# EAGLE board PCB (EAGLE 9.7.0)
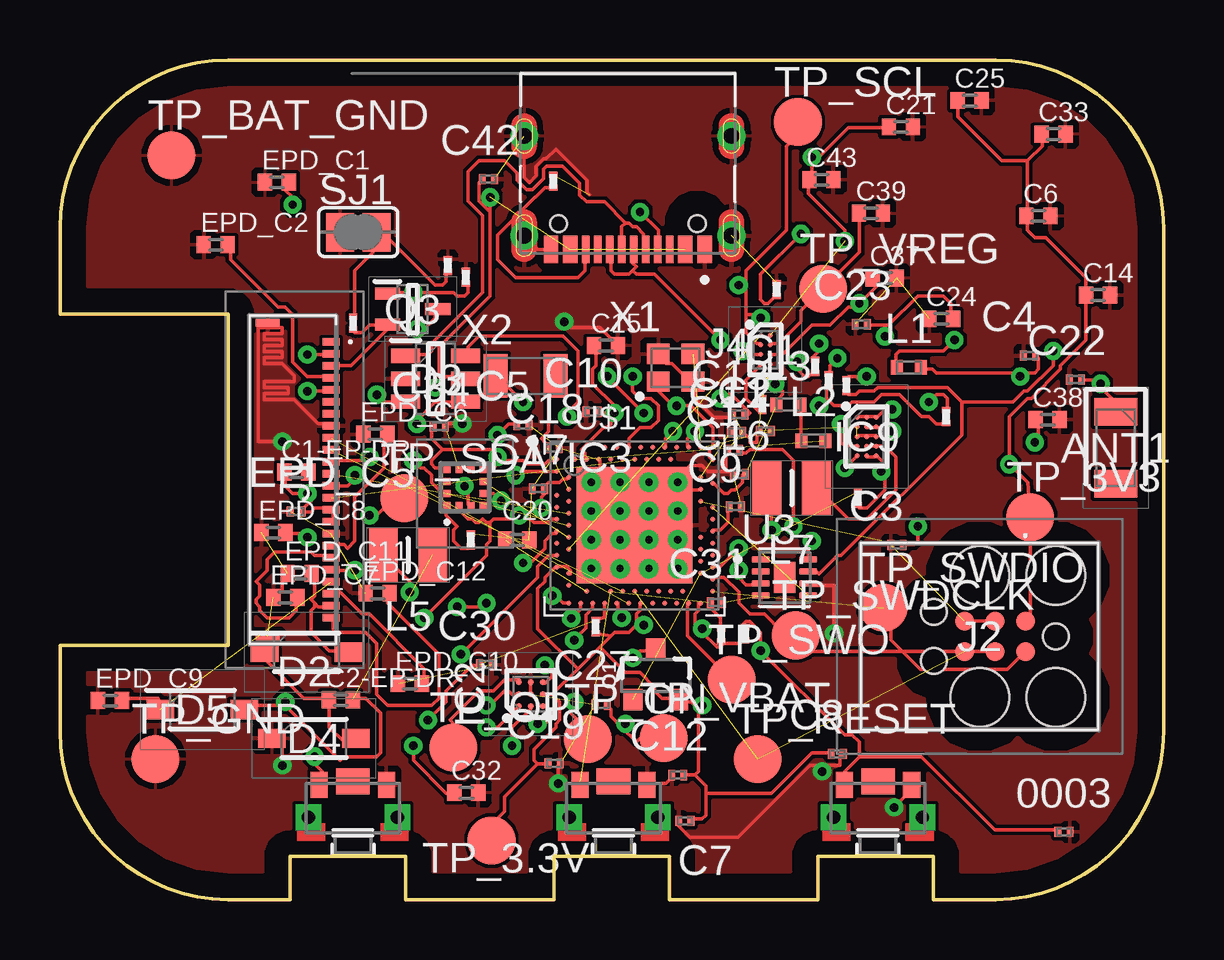
[diagram p0: board, top side]
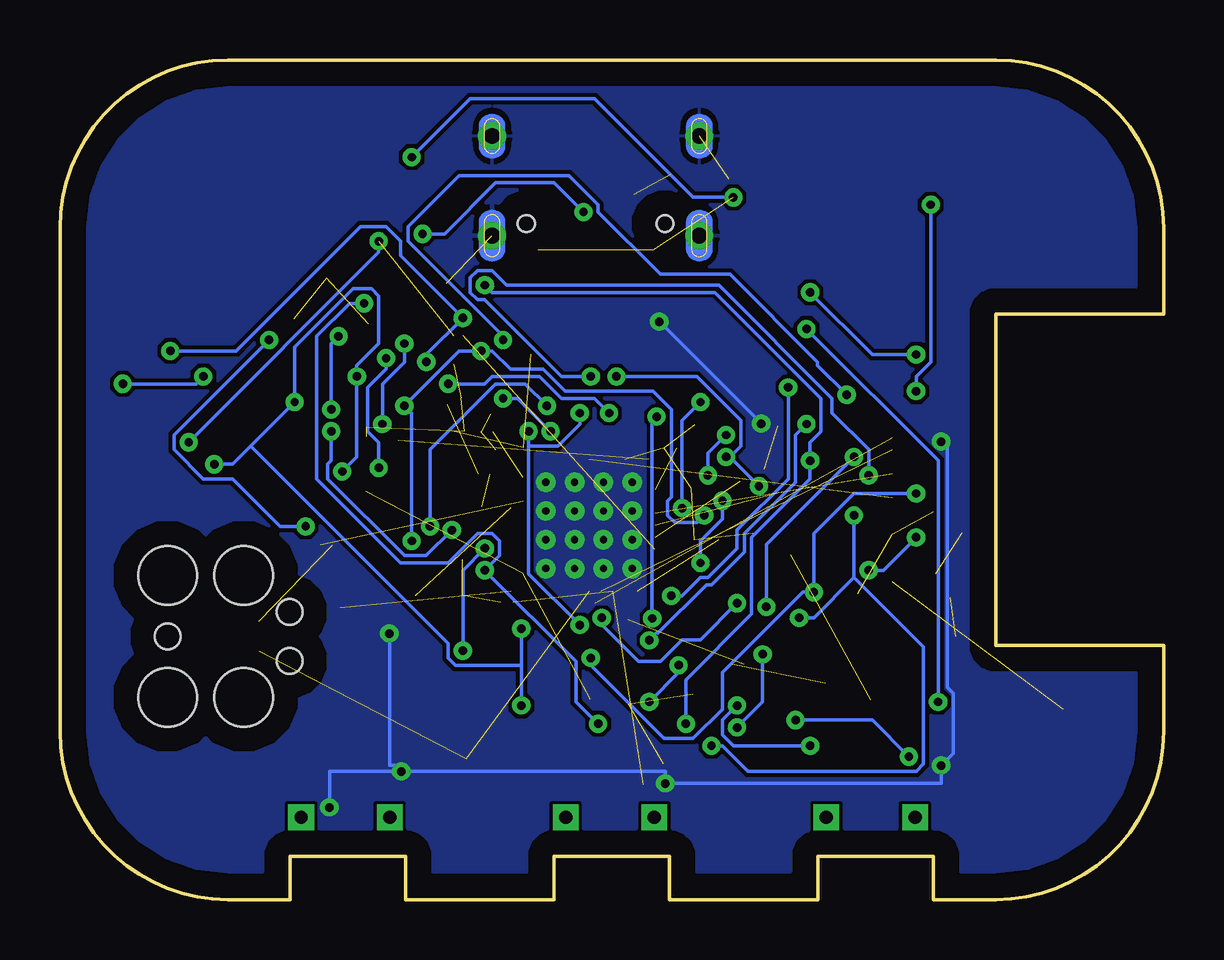
[diagram p1: board, bottom side, seen from below]

Size 46 x 35 mm. Coordinates in mm from the lower left corner, seen from the top.
Outline: 39,0 36.4,0 36.4,1.8 31.6,1.8 31.6,0 25.4,0 25.4,1.8 20.6,1.8 20.6,0 14.4,0 14.4,1.8 9.6,1.8 9.6,0 7,0 arc-90 0,7 0,10.6 7,10.6 7,24.4 0,24.4 0,28 arc-90 7,35 39,35 arc-90 46,28 46,7 arc-90 39,0
Copper layers (1*16): Top / Bottom
Stack-up Default Layer Stack: Top SilkScreen Epoxy Ink / Top SolderMask SR:Green 0.0254mm Dk 4.3 / Top Surface Finish Lead-Free 0.02mm / Top CuFoil:007 0.035mm / Dielectric-1 User Defined 1.5mm / Bottom CuFoil:007 0.035mm / Bottom Surface Finish Lead-Free 0.02mm / Bottom SolderMask SR:Green 0.0254mm Dk 4.3 / Bottom SilkScreen Epoxy Ink
Design rules: minimum copper width 6mil, minimum drill size 0.35mm, copper clearance wire_polygon to wire_polygon 6mil, copper clearance wire_polygon to pad_smd 6mil, copper clearance wire_polygon to via 6mil, copper clearance pad_smd to pad_smd 6mil, copper clearance pad_smd to via 6mil, copper clearance via to via 6mil, copper clearance smd to pad (same net) 6mil, copper clearance smd to via (same net) 6mil, copper clearance smd to smd (same net) 6mil, dimension clearance 40mil, via restrict clearance 0mil, restrict clearance 0mil, drill distance 6mil, keepout clearance 0mil

## Footprints (pad centres in the part's own frame; a part is rotated, then mirrored left to right if it is on the bottom)
NORDIC_NRF_3_RESC0201_L = smd 0.28 x 0.43: 1 -0.255,0; 2 0.255,0
2450AT18B100E_ANTC3216X140N = smd 1.15 x 1.8: 1 -1.5,0; 2 1.5,0
PERFECT_0402_0402 = smd 0.6 x 0.7: 1 -0.5,0; 2 0.5,0
ESP32_C6_LIBRARY_5_SOD3716X135N = smd 1.15 x 0.8: 1 -1.75,0; 2 1.75,0
ESP32_C6_LIBRARY_3_SOT95P280X145-6N = smd 1.2 x 0.6: 1 -1.25,0.95; 2 -1.25,0; 3 -1.25,-0.95; 4 1.25,-0.95; 5 1.25,0; 6 1.25,0.95
BQ25180YBGR_BGA8C40P2X4_100X155X50 = smd 0.2 x 0.2: A1 -0.2,0.6; A2 0.2,0.6; B1 -0.2,0.2; B2 0.2,0.2; C1 -0.2,-0.2; C2 0.2,-0.2; D1 -0.2,-0.6; D2 0.2,-0.6
DRV2605YZFR_BGA9C50P3X3_144X144X62 = smd 0.25 x 0.25: A1 -0.5,0.5; A2 0,0.5; A3 0.5,0.5; B1 -0.5,0; B2 0,0; B3 0.5,0; C1 -0.5,-0.5; C2 0,-0.5; C3 0.5,-0.5
BMA423_BMA423 = smd 0.3 x 0.35: 1 -0.75,-0.775; 2 -0.25,-0.775; 3 0.25,-0.775; 4 0.75,-0.775; 7 0.75,0.775; 8 0.25,0.775; 9 -0.25,0.775; 10 -0.75,0.775 | smd 0.35 x 0.3: 5 0.775,-0.25; 6 0.775,0.25; 11 -0.775,0.25; 12 -0.775,-0.25
RT6160AWSC_BGA15C40P3X5_140X230X60 = smd 0.216 x 0.216: A1 -0.4,0.8; A2 0,0.8; A3 0.4,0.8; B1 -0.4,0.4; B2 0,0.4; B3 0.4,0.4; C1 -0.4,0; C2 0,0; C3 0.4,0; D1 -0.4,-0.4; D2 0,-0.4; D3 0.4,-0.4; E1 -0.4,-0.8; E2 0,-0.8; E3 0.4,-0.8
503480-2400_5034802400 = smd 0.3 x 0.7: 1 -5.75,1.525; 2 -5.25,1.525; 3 -4.75,1.525; 4 -4.25,1.525; 5 -3.75,1.525; 6 -3.25,1.525; 7 -2.75,1.525; 8 -2.25,1.525; 9 -1.75,1.525; 10 -1.25,1.525; 11 -0.75,1.525; 12 -0.25,1.525; 13 0.25,1.525; 14 0.75,1.525; 15 1.25,1.525; 16 1.75,1.525; 17 2.25,1.525; 18 2.75,1.525; 19 3.25,1.525; 20 3.75,1.525; 21 4.25,1.525; 22 4.75,1.525; 23 5.25,1.525; 24 5.75,1.525 | smd 0.3 x 1: MP1 -6.54,-1.125; MP2 6.54,-1.125
TC2030-IDC_TC2030IDC = smd 0.783 x 0.783: 1 -0.953,-0.635; 2 -0.953,0.635; 3 0.317,-0.635; 4 0.317,0.635; 5 1.588,-0.635; 6 1.588,0.635 | hole 2.451: -2.223,-2.54; -2.223,2.54; 0.952,-2.54; 0.952,2.54 | hole 1.067: -2.223,0; 2.857,-1.016; 2.857,1.016
KH-TYPE-C-16P_KINGHELM_KH-TYPE-C-16P = smd 0.6 x 1.15: A1_B12 -3.2,4.725; A4_B9 -2.4,4.725; A9_B4 2.4,4.725; A12_B1 3.2,4.725 | smd 0.3 x 1.15: A5 -1.25,4.725; A6 -0.25,4.725; A7 0.25,4.725; A8 1.25,4.725; B5 1.75,4.725; B6 0.75,4.725; B7 -0.75,4.725; B8 -1.75,4.725 | drill 0.65 pad 1.05: SH1 -4.32,0; SH2 4.32,0; SH3 -4.32,4.15; SH4 4.32,4.15 | hole 0.7: -2.89,3.65; 2.89,3.65
NORDIC_NRF_2_RESC0402_L = smd 0.5 x 0.6: 1 -0.5,0; 2 0.5,0
MLP2016SR47MT0S1_INDC2016X100N = smd 1.2 x 2.2: 1 -1.028,0; 2 1.028,0
ESP32_C6_LIBRARY_4_ESP32_C6_LIBRARY_4_ESP32_C6_LIBRARY_4_ESP32_C6_LIBRARY_4_ESP32_WROVER_SPARKFUN-DISCRETESEMI_SOT23-3 = smd 0.8 x 0.9: 1 -0.95,-1; 2 0.95,-1; 3 0,1.1
ESP32_C6_LIBRARY_6_SOT65P210X110-3N = smd 1.05 x 0.5: 1 -1.05,0.65; 2 -1.05,-0.65; 3 1.05,0
CPF0201D7K68C1_0201 = smd 0.35 x 0.25: 1 0,0.275; 2 0,-0.275
ESP32_C6_LIBRARY_7_JUMPER_SJ = smd 1.168 x 1.6: 1 -0.762,0; 2 0.762,0
2025-10-22_07-23-44_LIBRARY_SW_EVP-AKE31A_PAN = smd 0.711 x 1.092: 1 -1.4,-0.972; 2 1.4,-0.972 | drill 0.559 pad 0.914 square: 3 -1.848,0.381; 4 1.848,0.381 | smd 1.397 x 1.092: 5 0,-1.124
HECTOR_WATCH_1_TP20R = smd 2 x 2: TP 0,0
ESP32_C6_LIBRARY_SON50P200X200X80-9N = smd 0.76 x 0.27: 1 -0.985,0.75; 2 -0.985,0.25; 3 -0.985,-0.25; 4 -0.985,-0.75; 5 0.985,-0.75; 6 0.985,-0.25; 7 0.985,0.25; 8 0.985,0.75 | smd 0.9 x 1.3: 9 0,0
NORDIC_NRF_4_AQFN50P700X700X85_HS-74N = smd 4.85 x 4.85: P$74 0,0 | drill 0.3 pad 0.6: P$75 -1.8,1.8; P$76 -0.6,1.8; P$77 0.6,1.8; P$78 1.8,1.8; P$79 -1.8,0.6; P$80 -0.6,0.6; P$81 0.6,0.6; P$82 1.8,0.6; P$83 -1.8,-0.6; P$84 -0.6,-0.6; P$85 0.6,-0.6; P$86 1.8,-0.6; P$87 -1.8,-1.8; P$88 -0.6,-1.8; P$89 0.6,-1.8; P$90 1.8,-1.8 | smd 0.2 x 0.2: P$A8 -1.25,3.25; P$A10 -0.75,3.25; P$A12 -0.25,3.25; P$A14 0.25,3.25; P$A16 0.75,3.25; P$A18 1.25,3.25; P$A20 1.75,3.25; P$A22 2.25,3.25; P$A23 2.75,3.25; P$AA24 3.25,-2.25; P$AB2 -2.75,-2.5; P$AC5 -2,-2.75; P$AC9 -1,-2.75; P$AC11 -0.5,-2.75; P$AC13 0,-2.75; P$AC15 0.5,-2.75; P$AC17 1,-2.75; P$AC19 1.5,-2.75; P$AC21 2,-2.75; P$AC24 3.25,-2.75; P$AD2 -2.75,-3.25; P$AD4 -2.25,-3.25; P$AD6 -1.75,-3.25; P$AD8 -1.25,-3.25; P$AD10 -0.75,-3.25; P$AD12 -0.25,-3.25; P$AD14 0.25,-3.25; P$AD16 0.75,-3.25; P$AD18 1.25,-3.25; P$AD20 1.75,-3.25; P$AD22 2.25,-3.25; P$AD23 2.75,-3.25; P$B1 -3.25,2.75; P$B3 -2.5,2.75; P$B5 -2,2.75; P$B7 -1.5,2.75; P$B9 -1,2.75; P$B11 -0.5,2.75; P$B13 0,2.75; P$B15 0.5,2.75; P$B17 1,2.75; P$B19 1.5,2.75; P$B24 3.25,2.75; P$C1 -3.25,2.25; P$D2 -2.75,2; P$D23 2.75,2; P$E24 3.25,1.75; P$F2 -2.75,1.5; P$F23 2.75,1.5; P$G1 -3.25,1.25; P$H2 -2.75,1; P$H23 2.75,1; P$J1 -3.25,0.75; P$J24 3.25,0.75; P$K2 -2.75,0.5; P$L1 -3.25,0.25; P$L24 3.25,0.25; P$M2 -2.75,0; P$N1 -3.25,-0.25; P$N24 3.25,-0.25; P$P2 -2.75,-0.5; P$P23 2.75,-0.5; P$R1 -3.25,-0.75; P$R24 3.25,-0.75; P$T2 -2.75,-1; P$T23 2.75,-1; P$U1 -3.25,-1.25; P$U24 3.25,-1.25; P$V23 2.75,-1.5; P$W1 -3.25,-1.75; P$W24 3.25,-1.75; P$Y2 -2.75,-2; P$Y23 2.75,-2
NORDIC_NRF_BT-XTAL_2016_N = smd 0.95 x 0.85: 1 -0.725,-0.575; 2 0.725,-0.575; 3 0.725,0.575; 4 -0.725,0.575
NORDIC_NRF_1_XTAL_3215_N = smd 1 x 1.8: 1 -1.25,0; 2 1.25,0

## Placement (x,y rotation side)
0003  [NORDIC_NRF_3_RESC0201_L]  41.85,2.82 0 top
ANT1  2450AT18B100E_2450AT18B100E  [2450AT18B100E_ANTC3216X140N]  44.01,18.83 270 top
C1  12pF  [NORDIC_NRF_3_RESC0201_L]  28.08,18.73 0 top
C1-EP-DR  10uF  [PERFECT_0402_0402]  9.85,17.82 0 top
C2  12pF  [NORDIC_NRF_3_RESC0201_L]  29.4,19.53 0 top
C2-EP-DR  4.7uF/25V  [PERFECT_0402_0402]  11.7,8.32 0 top
C3  1pF  [NORDIC_NRF_3_RESC0201_L]  34.89,14.78 0 top
C4  1pF  [NORDIC_NRF_3_RESC0201_L]  40.41,22.68 0 top
C5  100nF  [NORDIC_NRF_3_RESC0201_L]  19.3,19.78 0 top
C6  4.7µF  [PERFECT_0402_0402]  40.78,28.5 0 top
C7  100nF  [NORDIC_NRF_3_RESC0201_L]  26.05,3.28 180 top
C8  100nF  [NORDIC_NRF_3_RESC0201_L]  32.4,6.07 0 top
C9  820pF  [NORDIC_NRF_3_RESC0201_L]  28.15,16.38 0 top
C10  N.C.  [NORDIC_NRF_3_RESC0201_L]  22.18,20.33 0 top
C11  100pF  [NORDIC_NRF_3_RESC0201_L]  28.2,19.48 0 top
C12  100nF  [NORDIC_NRF_3_RESC0201_L]  25.75,5.19 0 top
C13  N.C.  [NORDIC_NRF_3_RESC0201_L]  28.3,20.23 0 top
C14  4.7µF  [PERFECT_0402_0402]  43.27,25.2 0 top
C15  1.0µF  [PERFECT_0402_0402]  22.76,23.1 0 top
C16  47nF  [NORDIC_NRF_3_RESC0201_L]  28.32,17.73 0 top
C17  12pF  [NORDIC_NRF_3_RESC0201_L]  19.94,17.13 0 top
C18  12pF  [NORDIC_NRF_3_RESC0201_L]  20.56,18.83 0 top
C19  100nF  [NORDIC_NRF_3_RESC0201_L]  20.6,5.68 0 top
C20  4.7µF  [PERFECT_0402_0402]  19.06,14.99 0 top
C21  4.7µF  [PERFECT_0402_0402]  35.05,32.21 0 top
C22  N.C.  [NORDIC_NRF_3_RESC0201_L]  42.33,21.68 0 top
C23  0.1uF  [NORDIC_NRF_3_RESC0201_L]  33.4,23.98 0 top
C24  10uF  [PERFECT_0402_0402]  36.73,24.21 0 top
C25  22uF  [PERFECT_0402_0402]  37.92,33.31 0 top
C27  0.1uF  [NORDIC_NRF_3_RESC0201_L]  22.56,8.13 0 top
C30  1uF  [NORDIC_NRF_3_RESC0201_L]  17.74,9.8 0 top
C31  1uF  [NORDIC_NRF_3_RESC0201_L]  27.37,12.38 0 top
C32  1uF  [PERFECT_0402_0402]  16.94,4.46 0 top
C33  22uF  [PERFECT_0402_0402]  41.41,31.91 0 top
C34  0.1uF  [NORDIC_NRF_3_RESC0201_L]  15.81,19.73 0 top
C37  1uF  [PERFECT_0402_0402]  34.38,25.91 0 top
C38  1uF  [PERFECT_0402_0402]  41.17,20.01 0 top
C39  10uF  [PERFECT_0402_0402]  33.8,28.61 0 top
C42  0.1uF  [NORDIC_NRF_3_RESC0201_L]  17.86,30.03 0 top
C43  4.7uF  [PERFECT_0402_0402]  31.74,30.01 0 top
D2  MBR0530  [ESP32_C6_LIBRARY_5_SOD3716X135N]  10.28,10.31 0 top
D3  USBLC6-2SC6Y  [ESP32_C6_LIBRARY_3_SOT95P280X145-6N]  15.66,21.71 0 top
D4  MBR0530  [ESP32_C6_LIBRARY_5_SOD3716X135N]  10.59,6.72 0 top
D5  MBR0530  [ESP32_C6_LIBRARY_5_SOD3716X135N]  5.93,7.92 0 top
EPD_C1  1uF/50V  [PERFECT_0402_0402]  9.04,29.9 0 top
EPD_C2  1uF/50V  [PERFECT_0402_0402]  6.49,27.3 0 top
EPD_C5  0.1uF/50V  [NORDIC_NRF_3_RESC0201_L]  9.85,16.18 0 top
EPD_C6  1uF/50V  [PERFECT_0402_0402]  13.14,19.4 0 top
EPD_C7  1uF/50V  [PERFECT_0402_0402]  9.39,12.6 0 top
EPD_C8  1uF/50V  [PERFECT_0402_0402]  8.89,15.3 0 top
EPD_C9  1uF/50V  [PERFECT_0402_0402]  2.09,8.3 0 top
EPD_C10  1uF/50V  [PERFECT_0402_0402]  14.59,9 0 top
EPD_C11  1uF/50V  [PERFECT_0402_0402]  9.99,13.6 0 top
EPD_C12  1uF/50V  [PERFECT_0402_0402]  13.24,12.77 0 top
IC1  BQ25180YBGR_BQ25180YBGR  [BQ25180YBGR_BGA8C40P2X4_100X155X50]  29.4,22.92 0 top
IC2  DRV2605YZFR  [DRV2605YZFR_BGA9C50P3X3_144X144X62]  19.62,8.56 90 top
IC3  BMA423_BMA423  [BMA423_BMA423]  16.88,17.18 0 top
IC9  RT6160AWSC_RT6160AWSC  [RT6160AWSC_BGA15C40P3X5_140X230X60]  33.62,19.3 0 top
J1  503480-2400_503480-2400  [503480-2400_5034802400]  9.78,17.5 270 top
J2  TC2030-IDC_TC2030-IDC  [TC2030-IDC_TC2030IDC]  39.29,10.97 180 top
J4  KH-TYPE-C-16P  [KH-TYPE-C-16P_KINGHELM_KH-TYPE-C-16P]  23.67,31.83 180 top
L1  3.9nH  [NORDIC_NRF_2_RESC0402_L]  35.38,22.18 0 top
L2  10µH  [NORDIC_NRF_2_RESC0402_L]  31.41,19.13 0 top
L3  15nH  [NORDIC_NRF_2_RESC0402_L]  30.36,20.63 0 top
L5  68uH  [MLP2016SR47MT0S1_INDC2016X100N]  14.51,14.37 0 top
L7  MLP2016SR47MT0S1_FTC252012SR47MBCA  [MLP2016SR47MT0S1_INDC2016X100N]  30.5,17.15 0 top
Q1  20V/4.2A/52mΩ/1.4W  [ESP32_C6_LIBRARY_4_ESP32_C6_LIBRARY_4_ESP32_C6_LIBRARY_4_ESP32_C6_LIBRARY_4_ESP32_WROVER_SPARKFUN-DISCRETESEMI_SOT23-3]  24.83,9.34 0 top
Q3  ESP32_C6_LIBRARY_6_SI1308EDL-T1-GE3  [ESP32_C6_LIBRARY_6_SOT65P210X110-3N]  14.7,24.61 0 top
R1_EP_DR  0.47  [CPF0201D7K68C1_0201]  12.22,24.03 0 top
R1_USB  5K1  [CPF0201D7K68C1_0201]  29.88,25.43 0 top
R2  0  [CPF0201D7K68C1_0201]  32.04,21.63 0 top
R2_EP_DR  10K  [CPF0201D7K68C1_0201]  16.92,25.94 0 top
R2_USB  5K1  [CPF0201D7K68C1_0201]  20.56,29.94 0 top
R3  0  [CPF0201D7K68C1_0201]  17.12,14.99 0 top
R4  0  [CPF0201D7K68C1_0201]  31.48,22.23 0 top
R5  10K  [CPF0201D7K68C1_0201]  22.33,11.38 0 top
R7  10K  [CPF0201D7K68C1_0201]  28.56,11.08 0 top
R8  10K  [CPF0201D7K68C1_0201]  27.56,11.03 0 top
R9  10K  [CPF0201D7K68C1_0201]  29.28,20.63 0 top
R17  3K3  [CPF0201D7K68C1_0201]  32.78,21.43 0 top
R18  3K3  [CPF0201D7K68C1_0201]  36.94,20.13 0 top
R_PWR_EPD  10K  [CPF0201D7K68C1_0201]  33.26,16.73 0 top
R_TYPE_SEL  2.2  [CPF0201D7K68C1_0201]  16.16,26.43 0 top
SJ1  [ESP32_C6_LIBRARY_7_JUMPER_SJ]  12.43,27.82 0 top
SW_DN  2025-10-22_07-23-44_LIBRARY_EVP-AKE31ASW_EVP-AKE31A_PAN  [2025-10-22_07-23-44_LIBRARY_SW_EVP-AKE31A_PAN]  34.1,3.81 180 top
SW_ENT  2025-10-22_07-23-44_LIBRARY_EVP-AKE31ASW_EVP-AKE31A_PAN  [2025-10-22_07-23-44_LIBRARY_SW_EVP-AKE31A_PAN]  23.07,3.81 180 top
SW_UP  2025-10-22_07-23-44_LIBRARY_EVP-AKE31ASW_EVP-AKE31A_PAN  [2025-10-22_07-23-44_LIBRARY_SW_EVP-AKE31A_PAN]  12.21,3.81 180 top
TP_3.3V  HECTOR_WATCH_1_TPTP20R  [HECTOR_WATCH_1_TP20R]  17.99,2.46 0 top
TP_3V3  HECTOR_WATCH_1_TPTP20R  [HECTOR_WATCH_1_TP20R]  40.44,15.94 0 top
TP_BAT_GND  HECTOR_WATCH_1_TPTP20R  [HECTOR_WATCH_1_TP20R]  4.65,31.02 0 top
TP_GND  HECTOR_WATCH_1_TPTP20R  [HECTOR_WATCH_1_TP20R]  3.98,5.86 0 top
TP_ON  HECTOR_WATCH_1_TPTP20R  [HECTOR_WATCH_1_TP20R]  22.01,6.69 0 top
TP_OP  HECTOR_WATCH_1_TPTP20R  [HECTOR_WATCH_1_TP20R]  16.4,6.34 0 top
TP_RESET  HECTOR_WATCH_1_TPTP20R  [HECTOR_WATCH_1_TP20R]  29.08,5.86 0 top
TP_SCL  HECTOR_WATCH_1_TPTP20R  [HECTOR_WATCH_1_TP20R]  30.76,32.41 0 top
TP_SDA  HECTOR_WATCH_1_TPTP20R  [HECTOR_WATCH_1_TP20R]  14.35,16.72 0 top
TP_SWDCLK  HECTOR_WATCH_1_TPTP20R  [HECTOR_WATCH_1_TP20R]  30.66,11.01 0 top
TP_SWDIO  HECTOR_WATCH_1_TPTP20R  [HECTOR_WATCH_1_TP20R]  34.33,12.16 0 top
TP_SWO  HECTOR_WATCH_1_TPTP20R  [HECTOR_WATCH_1_TP20R]  28.01,9.16 0 top
TP_VBAT  HECTOR_WATCH_1_TPTP20R  [HECTOR_WATCH_1_TP20R]  25.16,6.74 0 top
TP_VREG  HECTOR_WATCH_1_TPTP20R  [HECTOR_WATCH_1_TP20R]  31.82,25.46 0 top
U3  MAX17048G+T10  [ESP32_C6_LIBRARY_SON50P200X200X80-9N]  30.2,13.43 0 top
U$1  NORDIC_NRF_4_NRF52840_QF  [NORDIC_NRF_4_AQFN50P700X700X85_HS-74N]  23.95,15.6 0 top
X1  32MHz  [NORDIC_NRF_BT-XTAL_2016_N]  25.66,22.17 0 top
X2  32.768kHz  [NORDIC_NRF_1_XTAL_3215_N]  19.41,21.83 0 top

## Library data of the parts
0003 C1 C1-EP-DR C2 C2-EP-DR C3-C25 C27 C30-C34 C37-C39 C42 C43 EPD_C1 EPD_C2 EPD_C5-EPD_C12 L1-L3 R1_EP_DR R1_USB R2 R2_EP_DR R2_USB R3-R5 R7-R9 R17 R18 R_PWR_EPD R_TYPE_SEL SJ1 TP_3.3V TP_3V3 TP_BAT_GND TP_GND TP_ON TP_OP TP_RESET TP_SCL TP_SDA TP_SWDCLK TP_SWDIO TP_SWO TP_VBAT TP_VREG U$1 X1 X2 = InkTime_v5
ANT1 = InkTime_v5; ARROW_PART_NUMBER: 2450AT18B100E; ARROW_PRICE-STOCK: https://www.arrow.com/en/products/2450at18b100e/johanson-dielectrics?utm_currency=USD&region=nac; DESCRIPTION: Antennas 2.45GHz ANTENNA; HEIGHT: 1.4mm; MANUFACTURER_NAME: JOHANSON TECHNOLOGY; MANUFACTURER_PART_NUMBER: 2450AT18B100E; MOUSER_PART_NUMBER: 609-2450AT18B100E; MOUSER_PRICE-STOCK: https://www.mouser.co.uk/ProductDetail/Johanson-Technology/2450AT18B100E?qs=yCnrNFeXz%252Bh5MFsFIXGZGA%3D%3D
D2 D4 D5 = InkTime_v5; AVAILABILITY: In Stock; CHECK_PRICES: https://www.snapeda.com/parts/MBR0530/Onsemi/view-part/?ref=eda; DESCRIPTION: Diode Schottky 30 V 500mA Surface Mount SOD-123; MF: ON Semiconductor; MP: MBR0530; PACKAGE: SOD-123-2 ON Semiconductor; PRICE: None; PURCHASE-URL: https://www.snapeda.com/api/url_track_click_mouser/?unipart_id=179458&manufacturer=ON Semiconductor&part_name=MBR0530&search_term=None; SNAPEDA_LINK: https://www.snapeda.com/parts/MBR0530/Onsemi/view-part/?ref=snap
D3 = InkTime_v5; AVAILABILITY: In Stock; CHECK_PRICES: https://www.snapeda.com/parts/USBLC6-2SC6Y/STMicroelectronics/view-part/?ref=eda; DESCRIPTION: 17V Clamp 5A (8/20µs) Ipp Tvs Diode Surface Mount SOT-23-6; MF: STMicroelectronics; MP: USBLC6-2SC6Y; PACKAGE: SOT-23-6 STMicroelectronics; PRICE: None; SNAPEDA_LINK: https://www.snapeda.com/parts/USBLC6-2SC6Y/STMicroelectronics/view-part/?ref=snap
IC1 = InkTime_v5; ARROW_PART_NUMBER: BQ25180YBGR; ARROW_PRICE-STOCK: https://www.arrow.com/en/products/bq25180ybgr/texas-instruments?utm_currency=USD&region=nac; DESCRIPTION: Charger IC Lithium Ion/Polymer, Lithium Iron Phosphate 8-DSBGA (1.6x1.1); HEIGHT: 0.5mm; MANUFACTURER_NAME: Texas Instruments; MANUFACTURER_PART_NUMBER: BQ25180YBGR; MOUSER_PART_NUMBER: 595-BQ25180YBGR; MOUSER_PRICE-STOCK: https://www.mouser.co.uk/ProductDetail/Texas-Instruments/BQ25180YBGR?qs=doiCPypUmgEWjAK%252BJAX6Tw%3D%3D
IC2 = InkTime_v5; ARROW_PART_NUMBER: DRV2605YZFR; ARROW_PRICE-STOCK: https://www.arrow.com/en/products/drv2605yzfr/texas-instruments?region=nac; DESCRIPTION: Haptic Driver for ERM/LRA with Built-In Library and Smart Loop Architecture; HEIGHT: 0.625mm; MANUFACTURER_NAME: Texas Instruments; MANUFACTURER_PART_NUMBER: DRV2605YZFR
IC3 = InkTime_v5; ARROW_PART_NUMBER: BMA423; ARROW_PRICE-STOCK: https://www.arrow.com/en/products/bma423/bosch; DESCRIPTION: Accelerometers Triaxial low-g 12bit Acceleration Sensor; HEIGHT: 1mm; MANUFACTURER_NAME: BOSCH; MANUFACTURER_PART_NUMBER: BMA423; MOUSER_PART_NUMBER: 262-BMA423; MOUSER_PRICE-STOCK: https://www.mouser.co.uk/ProductDetail/Bosch-Sensortec/BMA423?qs=HXFqYaX1Q2xC%252BSgeGoX3mg%3D%3D
IC9 = InkTime_v5; DESCRIPTION: Buck-Boost Regulator Positive Output Step-Up/Step-Down I2C DC-DC Controller IC 15-WL-CSP (BSC) (1.4x2.3); HEIGHT: 0.6mm; MANUFACTURER_NAME: RICHTEK; MANUFACTURER_PART_NUMBER: RT6160AWSC; MOUSER_PART_NUMBER: 835-RT6160AWSC; MOUSER_PRICE-STOCK: https://www.mouser.co.uk/ProductDetail/Richtek/RT6160AWSC?qs=amGC7iS6iy%2FLd9PSoixZXQ%3D%3D
J1 = InkTime_v5; DESCRIPTION: FFC & FPC Connectors 0.5mm FPC RA SMT Dual Contact 24Ckt; HEIGHT: 1.87mm; MANUFACTURER_NAME: Molex; MANUFACTURER_PART_NUMBER: 503480-2400; MOUSER_PART_NUMBER: 538-503480-2400; MOUSER_PRICE-STOCK: https://www.mouser.co.uk/ProductDetail/Molex/503480-2400?qs=OAhjpuo3Vu7efIoxFh9AOw%3D%3D
J2 = InkTime_v5; DESCRIPTION: CABLE ADAPTER 6 POS; HEIGHT: 19mm; MANUFACTURER_NAME: Tag Connect; MANUFACTURER_PART_NUMBER: TC2030-IDC
J4 = InkTime_v5; AVAILABILITY: Not in stock; CHECK_PRICES: https://www.snapeda.com/parts/KH-TYPE-C-16P/Kinghelm/view-part/?ref=eda; MF: kinghelm; MP: KH-TYPE-C-16P; PACKAGE: None; PRICE: None; SNAPEDA_LINK: https://www.snapeda.com/parts/KH-TYPE-C-16P/Kinghelm/view-part/?ref=snap
L5 L7 = InkTime_v5; DESCRIPTION: SMD / SMT Inductors (Coils), L=0.47?H, L x W x T :; HEIGHT: 1mm; JLCPCB: https://jlcpcb.com/partdetail/6763488-FTC252012SR47MBCA/C5832368; MANUFACTURER_NAME: TDK; MANUFACTURER_PART_NUMBER: FTC252012SR47MBCA
Q1 = InkTime_v5; PROD_ID: TRAN-14388
Q3 = InkTime_v5; AVAILABILITY: In Stock; CHECK_PRICES: https://www.snapeda.com/parts/SI1308EDL-T1-GE3/Vishay+Siliconix/view-part/?ref=eda; DESCRIPTION: Si1308EDL-T1-GE3 N-channel MOSFET Transistor, 1.5 A, 30 V, 3-Pin SC-70 | Siliconix / Vishay SI1308EDL-T1-GE3; MF: Vishay Siliconix; MP: SI1308EDL-T1-GE3; PACKAGE: SOT-323 Vishay Semiconductor; PRICE: None; PURCHASE-URL: https://www.snapeda.com/api/url_track_click_mouser/?unipart_id=274603&manufacturer=Vishay Siliconix&part_name=SI1308EDL-T1-GE3&search_term=None; SNAPEDA_LINK: https://www.snapeda.com/parts/SI1308EDL-T1-GE3/Vishay+Siliconix/view-part/?ref=snap
SW_DN SW_ENT SW_UP = InkTime_v5; COPYRIGHT: Copyright (C) 2025 Ultra Librarian. All rights reserved.; DIGI-KEY_PART_NUMBER_1: P123437TR-ND; DIGI-KEY_PART_NUMBER_2: P123437CT-ND; DIGI-KEY_PART_NUMBER_3: P123437DKR-ND; MANUFACTURER_NAME: Panasonic; MANUFACTURER_PART_NUMBER: EVP-AKE31A
U3 = InkTime_v5; AVAILABILITY: In Stock; CHECK_PRICES: https://www.snapeda.com/parts/MAX17048G+T10/Analog+Devices/view-part/?ref=eda; DESCRIPTION: 3µA 1-Cell/2-Cell Fuel Gauge with ModelGauge; MF: Analog Devices; MP: MAX17048G+T10; PACKAGE: TDFN-8 Maxim; PRICE: None; PURCHASE-URL: https://www.snapeda.com/api/url_track_click_mouser/?unipart_id=329239&manufacturer=Analog Devices&part_name=MAX17048G+T10&search_term=None; SNAPEDA_LINK: https://www.snapeda.com/parts/MAX17048G+T10/Analog+Devices/view-part/?ref=snap

## Nets
3V3: C6.1 C7.1 C8.1 C12.2 C14.1 C19.1 C25.1 C33.1 C34.1 IC2.C2 IC3.3 IC3.7 IC3.10 IC9.E2 IC9.E3 J2.1 Q1.2 R5.2 R7.2 R8.2 R17.1 R18.1 R_PWR_EPD.2 TP_3.3V.TP TP_3V3.TP U$1.P$A22 U$1.P$AD14 U$1.P$AD23 U$1.P$B1 U$1.P$W1 U$1.P$Y2
ALERT: U3.5 U$1.P$J24
D+: D3.4 U$1.P$AD6
D-: D3.6 U$1.P$AD4
DEC1: C5.1 U$1.P$C1
DEC3: C11.1 U$1.P$D23
DEC4_6: C10.2 C15.1 C16.2 L3.1 U$1.P$B5 U$1.P$E24
DN: D3.1 J4.A7 J4.B7
DP: D3.3 J4.A6 J4.B6
EPD_3V3: C1-EP-DR.1 EPD_C5.2 J1.15 J1.16 L5.1 Q1.3
EPD_BUSY: J1.9 U$1.P$AD12
EPD_CS: J1.12 U$1.P$K2
EPD_DC: J1.11 U$1.P$AD10
EPD_RST: J1.10 U$1.P$AC11
GDR: J1.2 Q3.1 R2_EP_DR.2
GND: 0003.2 C1-EP-DR.2 C1.1 C2.1 C3.1 C4.1 C5.2 C6.2 C7.2 C8.2 C9.2 C10.1 C11.2 C12.1 C13.1 C14.2 C15.2 C16.1 C17.1 C18.2 C19.2 C20.2 C21.2 C22.1 C23.1 C24.1 C25.2 C27.1 C30.2 C31.2 C32.2 C33.2 C34.2 C37.2 C38.2 C39.2 C42.2 C43.2 D3.2 D4.1 EPD_C1.1 EPD_C2.1 EPD_C5.1 EPD_C6.1 EPD_C7.1 EPD_C8.1 EPD_C9.1 EPD_C10.1 EPD_C11.1 EPD_C12.1 IC1.D2 IC2.B2 IC2.B3 IC3.8 IC3.9 IC9.B1 IC9.C1 IC9.C2 IC9.C3 J1.8 J1.17 J1.MP1 J1.MP2 J2.3 J2.5 J4.A1_B12 J4.A12_B1 J4.SH1 J4.SH2 J4.SH3 J4.SH4 R1_USB.1 R2_EP_DR.1 R2_USB.1 R3.1 R9.1 R_TYPE_SEL.1 SJ1.1 SW_DN.1 SW_ENT.1 SW_UP.1 TP_BAT_GND.TP TP_GND.TP U3.1 U3.4 U3.6 U$1.P$74 U$1.P$75 U$1.P$76 U$1.P$77 U$1.P$78 U$1.P$79 U$1.P$80 U$1.P$81 U$1.P$82 U$1.P$83 U$1.P$84 U$1.P$85 U$1.P$86 U$1.P$87 U$1.P$88 U$1.P$89 U$1.P$90 U$1.P$B7 U$1.P$F23 X1.2 X1.4
HAPTIC_EN: IC2.A1 U$1.P$U1
IMU_INT1: IC3.5 U$1.P$N1
IMU_INT2: IC3.6 U$1.P$P2
LX1: IC9.B2 IC9.B3 L7.1
LX2: IC9.D2 IC9.D3 L7.2
MOSI: J1.14 U$1.P$B13
N$1: IC1.D1 R9.2
N$2: C2-EP-DR.1 D2.1 D4.2
N$3: IC3.1 R3.2
N$4: C23.2 C24.2 IC9.A1 IC9.A2 IC9.A3
N$5: IC9.E1 R2.1
N$6: R1_EP_DR.1 R_TYPE_SEL.2 SJ1.2
N$7: C20.1 U$1.P$AC5
N$8: C2-EP-DR.2 D5.2 L5.2 Q3.3
N$9: IC9.D1 R4.1
N$10: C9.1 U$1.P$N24
N$11: C32.1 IC2.A2
N$12: L2.2 U$1.P$B3
N$13: L2.1 L3.2
N$14: EPD_C6.2 J1.18
N$15: EPD_C7.2 J1.19
N$16: C13.2 U$1.P$A18
N$17: EPD_C2.2 J1.4
N$18: C2.2 U$1.P$A23 X1.3
N$19: C1.2 U$1.P$B24 X1.1
N$20: EPD_C8.2 J1.20
N$21: C3.2 L1.1 U$1.P$H23
N$22: J4.B5 R2_USB.2
N$23: EPD_C1.2 J1.5
N$24: EPD_C10.2 J1.22
N$25: U3.9
N$26: EPD_C12.2 J1.24
N$28: J4.A5 R1_USB.2
OUT+: IC2.A3 TP_OP.TP
OUT-: IC2.C3 TP_ON.TP
P0.00: C17.2 U$1.P$D2 X2.1
P0.01: C18.1 U$1.P$F2 X2.2
P0.04: U$1.P$J1
P0.09: U$1.P$L24
P0.13: C30.1 R5.1 SW_UP.2 U$1.P$AD8
P0.14: C31.1 R8.1 SW_ENT.2 U$1.P$AC9
P0.19: U$1.P$AC15
P0.20: U$1.P$AD16
P0.21: U$1.P$AC17
P0.22: U$1.P$AD18
P0.23: U$1.P$AC19
P0.24: U$1.P$AD20
P0.25: U$1.P$AC21
P0.26: U$1.P$G1
P0.27: U$1.P$H2
P0.28: U$1.P$B11
P0.29: U$1.P$A10
P0.30: U$1.P$B9
P0.31: U$1.P$A8
P1.01: Q1.1 R_PWR_EPD.1 U$1.P$Y23
P1.02: 0003.1 R7.1 SW_DN.2 U$1.P$W24
P1.03: U$1.P$V23
P1.04: U$1.P$U24
P1.05: U$1.P$T23
P1.06: U$1.P$R24
P1.07: U$1.P$P23
P1.09: U$1.P$R1
P1.10: U$1.P$A20
P1.11: U$1.P$B19
P1.12: U$1.P$B17
P1.13: U$1.P$A16
P1.14: U$1.P$B15
P1.15: U$1.P$A14
PMIC_INT: IC1.A1 U$1.P$T2
PREVGH: D5.1 EPD_C9.2 J1.21
PREVGL: D2.2 EPD_C11.2 J1.23
RESE: J1.3 Q3.2 R1_EP_DR.2
RESET: J2.6 TP_RESET.TP U$1.P$AC13
RF: ANT1.1 C4.2 C22.2 L1.2
SCK: J1.13 U$1.P$A12
SCL: IC1.B1 IC2.C1 IC3.12 R4.2 R17.2 TP_SCL.TP U3.7 U$1.P$M2
SDA: IC1.C1 IC2.B1 IC3.2 R2.2 R18.2 TP_SDA.TP U3.8 U$1.P$L1
SWDCLK: J2.4 TP_SWDCLK.TP U$1.P$AA24
SWDIO: J2.2 TP_SWDIO.TP U$1.P$AC24
SWO: TP_SWO.TP U$1.P$AD22
VBAT: C27.2 C37.1 IC1.C2 TP_VBAT.TP U3.2 U3.3
VBUS: C21.1 C38.1 C42.1 C43.1 D3.5 IC1.A2 J4.A4_B9 J4.A9_B4 U$1.P$AD2
VREG: C39.1 IC1.B2 TP_VREG.TP

## Tracks (layer width: path | path; a pad name or v marks a point on that pad's centre or on a via)
3V3  (via drill 0.35)
  Top 0.152: 40.33,30.8 40.33,28.51 | 40.33,30.8 40.94,31.41 40.94,31.86 C33.1 | 40.33,30.8 39.27,30.8 37.44,32.62 37.44,33.23 C25.1 | 40.33,28.51 40.49,28.36 40.33,28.21 40.33,27.9 40.64,27.6 41.09,27.6 42.77,25.92 42.77,25.31 C14.1 42.77,25.16 42.77,23.33 41.7,22.26 41.7,22.11 40.49,20.89 40.33,20.89 39.57,20.13 v39.57,18.15 40.34,17.38 TP_3V3.TP 40.44,11.8 J2.1 | 40.33,28.51 C6.1 | IC9.E2 33.63,18.45 33.93,18.45 IC9.E3 34.08,18.45 34.39,18.15 34.39,17.84 | 34.39,17.84 34.39,17.08 33.63,16.32 33.32,16.32 33.17,16.47 R_PWR_EPD.2 | v33.63,21.81 33.47,21.65 33.32,21.65 33.17,21.81 32.87,21.81 R17.1 | 34.39,17.84 v34.24,17.84 | v36.22,20.74 36.52,21.04 36.83,21.04 36.98,20.89 36.98,20.43 R18.1 | 26.77,11.14 27.38,10.53 27.53,10.53 27.68,10.68 | 26.77,11.14 26.46,11.44 26.46,11.9 26.62,12.05 26.62,12.36 U$1.P$AD23 | 27.68,10.68 28.29,10.68 28.45,10.83 R7.2 | 27.68,10.68 R8.2 | 26.92,4.43 26.92,4.74 26.46,5.19 | 26.92,4.43 26.92,3.52 26.77,3.36 26.31,3.36 C7.1 | 26.46,5.19 C12.2 | 26.92,4.43 29.66,4.43 31.34,6.11 32.1,6.11 C8.1 | 26.62,7.94 26.31,8.24 25.85,8.24 Q1.2 25.7,8.39 25.09,8.39 24.79,8.7 24.79,8.85 24.18,9.46 23.57,9.46 22.5,10.53 | 26.62,7.94 26.62,5.35 26.46,5.19 | 26.77,11.14 v26.77,11.29 | 26.62,7.94 v26.77,8.09 | 18.39,18.3 19.3,18.3 19.45,18.15 20.22,18.15 20.37,18.3 20.67,18.3 U$1.P$B1 | 18.39,18.3 18.08,18 17.78,18 IC3.7 | v16.86,17.23 17.02,17.08 17.02,16.47 IC3.3 | 18.39,18.3 v18.23,18.45 17.93,18.76 15.95,18.76 | 15.95,18.76 15.49,18.3 15.49,18.15 15.64,18 16.1,18 IC3.10 | 15.95,18.76 15.49,19.21 15.49,19.67 C34.1 | 19.91,5.65 20.22,5.65 C19.1 | 19.91,5.65 18.54,4.28 18.54,3.67 18.08,3.21 18.08,2.6 TP_3.3V.TP
  Top 0.152: 20.67,13.88 21.13,13.88 21.28,13.73 21.28,13.57 U$1.P$Y2 | 24.03,11.75 24.03,11.44 23.72,11.14 23.11,11.14 22.97,11 | 24.03,11.75 24.03,11.9 24.18,12.05 24.18,12.36 U$1.P$AD14 | 22.97,11 R5.2 | v26.46,19.52 26.16,19.21 26.16,18.91 U$1.P$A22 | 24.03,11.75 v24.33,11.44 | 20.52,8.55 20.22,8.55 IC2.C2 | 22.97,11 22.5,10.53 | 22.5,10.53 21.59,9.61 | 21.59,9.61 20.52,8.55 | 20.67,13.88 20.22,13.42 20.22,13.27 19.91,12.97 19.91,11.29 21.59,9.61 | 20.67,13.88 U$1.P$W1 | 19.91,5.65 19.76,5.8 19.76,6.26 20.67,7.17 20.67,7.33 20.82,7.48 20.82,8.24 20.52,8.55 | v22.81,21.81 v24.33,20.28
  Bottom 0.152: v34.24,17.84 33.63,18.45 v33.63,21.81 33.63,22.26 32.71,23.18 32.71,25.16 33.02,25.46 33.78,25.46 36.22,23.02 v36.22,20.74 38.05,18.91 | v39.57,18.15 38.81,18.15 38.05,18.91 | v26.77,8.09 26.77,9.77 | 26.77,9.77 v26.77,11.29 | 18.08,18.45 v16.86,17.23 | 26.46,18.91 26.46,13.57 v24.33,11.44 | 26.46,18.91 v26.46,19.52 | 18.08,18.45 17.62,18.91 17.62,19.98 19.45,21.81 v22.81,21.81 | v24.33,20.28 24.33,19.82 25.25,18.91 26.46,18.91 | 18.08,18.45 v18.23,18.45 | 38.05,18.91 29.82,10.68 29.82,10.07 29.51,9.77 26.77,9.77
ALERT  (1 unrouted)
D+  (via drill 0.35)
  Top 0.152: v14.88,19.82 14.88,19.98 15.64,20.74 16.86,20.74 D3.4 | U$1.P$AD6 22.2,12.15 21.92,11.87 21.92,11.32 21.43,10.83 v21.43,10.81
  Bottom 0.152: v14.88,19.82 15.34,19.37 15.34,17.39 17.47,15.25 17.47,14.49 18.84,13.12 19.06,13.12 21.06,11.11 21.13,11.11 v21.43,10.81
D-  (via drill 0.35)
  Top 0.152: v21.13,20.13 21.13,20.28 21.59,20.74 21.59,22.87 20.98,23.48 17.47,23.48 17.02,23.02 17.02,22.72 D3.6 | U$1.P$AD4 21.7,12.1 v21.32,11.72
  Bottom 0.152: v21.13,20.13 21.32,19.94 v21.32,11.72
DEC1  (via drill 0.35)
  Top 0.152: v19,17.69 19.15,17.84 20.67,17.84 U$1.P$C1 | v18.23,19.37 18.69,19.82 19,19.82 C5.1
  Bottom 0.152: v19,17.69 19,18.6 v18.23,19.37
DEC3  (1 unrouted)
DEC4_6  (via drill 0.35)  (1 unrouted)
  Top 0.152: 22.96,20.13 22.96,19.82 22.81,19.67 22.65,19.67 21.74,18.76 21.89,18.6 21.89,18.3 U$1.P$B5 | 22.96,20.13 22.81,20.28 22.5,20.28 C10.2 | v29.82,21.5 30.12,21.19 30.12,21.04 29.97,20.89 29.97,20.74 L3.1 | 22.96,20.13 v23.11,20.28 23.11,20.59 22.2,21.5 22.2,22.11 22.35,22.26 22.35,23.02 C15.1 | U$1.P$E24 27.23,17.39 27.68,16.93 27.84,16.93 27.99,17.08 28.14,17.08 28.45,17.39 28.45,17.69 C16.2
  Bottom 0.152: v29.82,21.5 28.29,21.5 27.99,21.81 26.01,21.81 25.09,20.89 23.72,20.89 v23.11,20.28
DN
  Top 0.152: 23.57,28.21 23.42,28.05 23.42,27.14 J4.A7 | 23.57,28.21 23.72,28.21 23.87,28.05 24.03,28.05 24.33,27.75 24.33,27.14 J4.B7 | D3.1 14.42,22.72 15.34,22.72 15.49,22.87 15.49,23.18 17.62,25.31 17.62,28.51 17.02,29.12 17.02,30.34 17.47,30.8 18.54,30.8 19.04,30.29 19.04,29.98 19.44,29.58 19.7,29.58 20.16,30.04 20.16,30.44 20.29,30.57 20.96,30.57 21.66,29.86 21.66,29.36 21.94,29.08 22.69,29.08 23.57,28.21
DP  (via drill 0.35)
  Top 0.152: 23.87,26.22 24.03,26.38 23.87,26.53 23.87,26.99 J4.A6 | 23.87,26.22 23.72,26.07 23.11,26.07 22.96,26.22 22.96,26.99 J4.B6 | v13.21,21.04 13.51,20.74 14.27,20.74 D3.3 | v27.53,23.33 24.79,26.07 24.03,26.07 23.87,26.22
  Bottom 0.152: v13.21,21.04 14.42,22.26 14.42,22.41 18.08,26.07 20.98,26.07 23.57,28.66 23.57,28.97 24.79,30.19 29.36,30.19 31.49,28.05 31.49,27.44 27.53,23.48 v27.53,23.33
EPD_3V3  (via drill 0.35)
  Top 0.152: J1.16 11.38,15.86 11.38,16.17 J1.15 11.22,16.32 10.61,16.32 10.46,16.17 10.16,16.17 EPD_C5.2 10.16,16.32 10.46,16.62 10.46,16.78 v10.31,16.93 9.7,16.93 9.39,17.23 9.39,17.54 9.55,17.69 9.39,17.84 C1-EP-DR.1 | v23.87,10.07 24.18,10.38 24.79,10.38 Q1.3 | v14.58,12.81 14.58,13.27 13.51,14.34 L5.1
  Bottom 0.152: v23.87,10.07 23.87,9.77 20.82,6.72 19.61,6.72 18.39,7.94 18.39,9.46 15.03,12.81 v14.58,12.81 14.58,15.25 12.9,16.93 v10.31,16.93
EPD_BUSY  (1 unrouted)
EPD_CS  (1 unrouted)
EPD_DC  (via drill 0.35)
  Top 0.152: v23.42,11.75 23.26,11.9 23.26,12.36 U$1.P$AD10 | v17.78,12.36 17.62,12.2 v16.56,12.2 | v12.9,18.45 12.75,18.3 11.38,18.3 J1.11
  Bottom 0.152: v23.42,11.75 23.42,11.44 21.89,9.92 20.98,9.92 20.06,10.83 19.3,10.83 v17.78,12.36 | v16.56,12.2 16.56,14.79 v12.9,18.45
EPD_RST  (1 unrouted)
GDR  (via drill 0.35)
  Top 0.152: R2_EP_DR.2 17.02,25.61 17.02,25.31 16.86,25.16 16.56,25.16 16.41,25.31 v14.73,25.31 13.66,25.31 Q3.1 | v10.31,22.72 11.22,22.72 J1.2
  Bottom 0.152: v10.31,22.72 12.14,22.72 v14.73,25.31
GND  (via drill 0.35)  (28 unrouted)
  Top 0.152: IC2.B2 19.61,8.55 19.61,9 IC2.B3 | U$1.P$B7 22.5,18.3 22.5,17.84 22.2,17.54 U$1.P$74 25.85,17.39 | 25.85,17.39 26.16,17.08 26.62,17.08 U$1.P$F23 | 25.85,17.39 U$1.P$78 25.77,17.59 26.27,18.09 26.77,18.09 27.02,17.84 27.77,17.84 | C11.2 28.45,19.37 28.6,19.37 28.75,19.21 28.75,19.06 29.05,19.06 29.05,19.52 C2.1 | v16.77,19.84 16.02,19.84 C34.2 | v21.02,24.09 21.27,23.84 22.52,23.84 C15.2 | X1.4 25.02,22.59 25.27,22.34 25.52,22.34 26.02,21.84 26.27,21.84 X1.2 26.52,21.59 26.52,20.84 27.27,20.09 28.02,20.09 C13.1 | 33.52,19.34 33.27,19.34 IC9.C1 | 33.52,19.34 34.02,19.34 IC9.C3 | 33.52,19.34 IC9.C2 | IC3.9 16.77,18.09 17.02,18.09 IC3.8 | EPD_C11.1 9.27,13.59 9.27,12.84 9.02,12.84 EPD_C7.1 | 31.77,5.59 31.27,5.59 28.27,2.59 26.27,2.59 25.77,3.09 C7.2 | 31.77,5.59 32.52,5.59 32.52,6.09 C8.2 | C12.1 25.52,5.09 25.27,4.84 24.52,4.84 SW_ENT.1 | 31.77,5.59 v31.77,5.34 | v34.77,3.84 35.52,4.59 SW_DN.1 | v20.77,4.84 20.77,5.59 C19.2 | v9.27,5.59 9.27,6.59 9.02,6.59 D4.1 | v9.27,19.09 8.27,19.09 8.27,23.84 9.27,23.84 9.27,23.59 8.52,23.59 8.52,23.34 9.27,23.34 9.27,23.09 8.52,23.09 8.52,22.84 9.27,22.84 9.27,22.59 8.52,22.59 8.52,22.34 9.27,22.34 9.77,21.84 9.77,21.59 8.52,21.59 8.52,21.34 9.52,21.34 9.52,21.09 8.52,21.09 8.52,20.84 9.77,20.84 10.77,19.84 11.27,19.84 J1.8 | 27.77,17.84 27.77,18.59 C1.1 | 27.77,17.84 28.02,17.84 C16.1 | v32.27,11.09 32.27,13.09 31.27,13.09 U3.6 | J4.A12_B1 19.93,27.1 J4.SH4 | J4.SH2 19.35,30.11 19.57,29.89 19.85,30.17 19.85,30.57 20.16,30.88 20.26,30.88 20.67,31.29 21.97,29.99 21.97,29.49 22.07,29.39 | J2.3 J2.5
  Bottom 0.152: v21.02,24.09 v16.77,19.84 | v31.77,5.34 34.77,5.34 v34.77,3.84 | v31.77,5.34 20.77,5.34 v20.77,4.84 9.27,4.84 v9.27,5.59 8.77,6.09 8.77,8.59 9.02,8.84 9.02,18.84 v9.27,19.09 | v32.27,11.09 32.27,5.59 31.77,5.59 v31.77,5.34
  pour Top: -3.93,37.99 -3.93,-0.81 -0.83,-3.91 51.17,-3.91 53.47,-1.61 53.47,31.29 47.07,37.69 -3.63,37.69
  pour Bottom: -3.33,37.59 -3.33,-0.51 -1.03,-2.81 50.27,-2.81 52.17,-0.91 52.17,35.29 50.27,37.19 -3.03,37.19 -3.33,37.49
HAPTIC_EN  (via drill 0.35)
  Top 0.152: v16.71,10.22 19.91,13.42 19.91,13.88 20.37,14.34 20.67,14.34 U$1.P$U1 | v17.78,7.17 18.23,7.17 IC2.A1 19.15,8.09
  Bottom 0.152: v16.71,10.22 16.71,8.24 v17.78,7.17
IMU_INT1  (via drill 0.35)
  Top 0.152: v19.3,14.03 19.61,14.03 20.22,14.64 20.22,14.95 20.52,15.25 20.67,15.25 U$1.P$N1 | v18.39,16.62 18.08,16.93 17.78,16.93 IC3.5
  Bottom 0.152: v19.3,14.03 19.3,14.95 18.39,15.86 v18.39,16.62
IMU_INT2  (1 unrouted)
LX1  (via drill 0.35)
  Top 0.152: IC9.B2 33.63,19.67 33.93,19.67 IC9.B3 34.08,19.67 34.54,19.67 v34.69,19.52 | v29.66,15.4 29.66,16.93 29.51,17.08 L7.1
  Bottom 0.152: v34.69,19.52 34.69,18.3 34.85,18.15 34.85,17.54 31.65,14.34 30.73,14.34 v29.66,15.4
LX2
  Top 0.152: IC9.D2 33.93,18.91 IC9.D3 34.08,18.91 34.39,18.91 34.85,18.45 34.85,17.08 33.63,15.86 32.87,15.86 31.65,17.08 L7.2
MOSI  (1 unrouted)
N$1
  Top 0.152: IC1.D1 29.21,22.26 28.6,21.65 28.6,20.89 29.21,20.28 R9.2
N$2
  Top 0.152: D4.2 12.29,6.72 12.14,6.57 11.83,6.57 11.22,7.17 11.22,8.24 C2-EP-DR.1 11.22,8.39 11.07,8.55 10.92,8.39 10.16,8.39 8.63,9.92 8.63,10.22 D2.1
N$3
  Top 0.152: IC3.1 16.1,16.32 16.1,16.01 16.56,15.56 16.41,15.4 16.41,14.95 16.71,14.64 17.02,14.64 R3.2
N$4  (via drill 0.35)
  Top 0.152: 33.63,20.13 33.32,20.13 IC9.A1 | 33.63,20.13 33.93,20.13 IC9.A3 34.08,20.13 34.39,20.43 v34.69,20.43 | 33.63,20.13 IC9.A2 | 34.39,23.94 34.54,23.94 35.76,25.16 36.83,25.16 37.13,24.85 37.13,24.24 C24.2 | 34.39,23.94 33.78,23.94 C23.2 | 34.39,23.94 v34.39,23.48
  Bottom 0.152: v34.69,20.43 34.69,23.18 v34.39,23.48
N$5  (via drill 0.35)
  Top 0.152: v32.71,18 33.17,18.45 IC9.E1 | v32.41,22.57 32.1,22.26 32.1,21.96 R2.1
  Bottom 0.152: v32.71,18 32.71,19.06 33.17,19.52 33.17,21.35 32.41,22.11 v32.41,22.57
N$6
  Top 0.152: R1_EP_DR.1 12.29,24.4 12.29,26.22 13.05,26.99 13.05,27.75 SJ1.2 13.21,27.75 13.51,27.75 15.64,25.61 15.95,25.61 16.1,25.77 16.1,26.07 R_TYPE_SEL.2
N$7  (1 unrouted)
N$8  (via drill 0.35)  (1 unrouted)
  Top 0.152: 9.39,8.09 11.68,5.8 11.83,5.95 13.21,5.95 13.36,6.11 13.36,7.78 12.75,8.39 12.29,8.39 C2-EP-DR.2 | 9.39,8.09 7.74,8.09 D5.2 | v14.88,23.79 15.19,23.79 15.64,24.24 15.64,24.55 Q3.3 | v9.39,8.24 9.39,8.09
  Bottom 0.152: v14.88,23.79 9.39,18.3 v9.39,8.24
N$9  (via drill 0.35)
  Top 0.152: v32.56,19.82 32.56,19.06 32.71,18.91 33.17,18.91 IC9.D1 | v31.65,23.18 31.65,22.87 31.34,22.57 R4.1
  Bottom 0.152: v32.56,19.82 32.56,21.5 31.65,22.41 v31.65,23.18
N$10
  Top 0.152: U$1.P$N24 27.23,15.4 27.53,15.4 27.84,15.71 27.84,16.32 C9.1
N$11  (via drill 0.35)
  Top 0.152: v17.78,8.09 17.93,8.09 18.54,8.7 18.69,8.7 18.84,8.55 19,8.55 IC2.A2 | v14.73,6.41 14.73,5.8 16.1,4.43 16.41,4.43 C32.1
  Bottom 0.152: v17.78,8.09 18.39,7.48 18.39,6.87 17.93,6.41 v14.73,6.41
N$12  (1 unrouted)
N$13
  Top 0.152: L3.2 30.88,20.59 30.88,19.21 L2.1
N$14
  Top 0.152: J1.18 11.38,14.79 11.83,14.79 11.99,14.64 12.29,14.95 12.29,16.78 13.51,18 13.51,19.37 EPD_C6.2
N$15
  Top 0.152: EPD_C7.2 9.85,12.51 9.85,12.05 9.55,11.75 8.63,11.75 8.33,12.05 8.33,12.2 8.18,12.36 8.18,12.51 8.33,12.66 8.33,13.12 8.18,13.27 8.63,13.73 8.63,14.18 8.94,14.49 10.46,14.49 10.61,14.34 11.22,14.34 J1.19
N$16  (via drill 0.35)
  Top 0.152: v25.55,19.52 25.25,19.21 25.25,18.91 U$1.P$A18 | v27.53,20.89 27.68,21.04 27.99,21.04 28.75,20.28 28.6,20.13 C13.2
  Bottom 0.152: v25.55,19.52 26.92,20.89 v27.53,20.89
N$17
  Top 0.152: EPD_C2.2 7.11,27.29 7.11,26.68 9.09,24.7 9.39,24.7 9.7,24.4 9.7,22.41 10.31,21.81 11.22,21.81 J1.4
N$18  (2 unrouted)
N$19  (via drill 0.35)
  Top 0.152: U$1.P$B24 27.23,18.3 27.07,18.45 27.07,18.76 27.23,18.91 27.23,19.67 26.31,20.59 v25.7,20.59 25.55,20.59 24.94,21.19 24.94,21.5 X1.1 | v30.58,15.56 30.58,18.3 30.12,18.76 28.75,18.76 28.6,18.6 28.45,18.6 C1.2
  Bottom 0.152: v30.58,15.56 30.58,18.76 27.84,21.5 26.62,21.5 v25.7,20.59
N$20  (via drill 0.35)
  Top 0.152: v12.29,13.73 11.38,13.73 J1.20 | v10.31,15.1 10.16,15.25 9.39,15.25 EPD_C8.2
  Bottom 0.152: v12.29,13.73 11.68,13.73 v10.31,15.1
N$21  (via drill 0.35)  (1 unrouted)
  Top 0.152: v35.76,15.56 35.76,14.95 35.61,14.79 35.15,14.79 C3.2 | v37.28,23.33 36.83,22.87 35,22.87 34.85,22.72 34.85,22.26 L1.1
  Bottom 0.152: v35.76,15.56 36.83,15.56 38.81,17.54 40.03,17.54 41.25,18.76 41.25,19.37 v37.28,23.33
N$22
  Top 0.152: J4.B5 21.89,26.99 21.89,26.22 21.59,25.92 19,25.92 18.23,26.68 18.23,27.71 19.81,29.28 19.82,29.28 20.21,29.67 R2_USB.2
N$23  (via drill 0.35)
  Top 0.152: v10.31,21.19 11.22,21.19 J1.5 | v9.7,28.97 9.7,29.27 9.39,29.58 9.39,29.88 EPD_C1.2
  Bottom 0.152: v10.31,21.19 10.31,21.81 9.7,22.41 v9.7,28.97
N$24
  Top 0.152: EPD_C10.2 15.19,9 15.19,9.61 12.9,11.9 12.6,11.9 11.68,12.81 11.38,12.81 J1.22
N$26
  Top 0.152: J1.24 11.38,11.75 11.38,11.29 11.53,11.14 12.75,11.14 13.21,10.68 13.21,8.55 13.66,8.09 15.49,8.09 15.8,8.39 15.8,10.22 13.66,12.36 13.66,12.66 EPD_C12.2
N$28  (via drill 0.35)
  Top 0.152: v30.88,27.75 29.21,26.07 29.21,25 29.36,24.85 29.51,24.85 29.82,25.16 R1_USB.2 | v24.18,28.66 24.94,27.9 24.94,27.14 J4.A5
  Bottom 0.152: v30.88,27.75 29.97,27.75 27.84,29.88 25.4,29.88 v24.18,28.66
OUT+
  Top 0.152: IC2.A3 19.15,9.16 18.54,9.16 18.08,8.7 17.47,8.7 16.25,7.48 16.41,7.33 16.41,6.41 TP_OP.TP
OUT-  (via drill 0.35)
  Top 0.152: v20.22,9.77 20.52,9.46 20.52,9.31 20.22,9 IC2.C3 | v21.43,8.24 21.43,8.09 21.28,7.94 21.28,7.78 21.89,7.17 21.89,6.72 TP_ON.TP
  Bottom 0.152: v20.22,9.77 20.22,9.46 v21.43,8.24
P0.00  (via drill 0.35)
  Top 0.152: U$1.P$D2 21.13,17.54 20.98,17.54 20.82,17.39 20.37,17.39 20.22,17.23 C17.2 20.22,17.08 20.22,16.93 20.06,16.78 20.06,16.62 20.22,16.47 v20.06,16.32 | v19.3,20.74 18.23,21.81 X2.1
  Bottom 0.152: v20.06,16.32 20.06,19.98 v19.3,20.74
P0.01  (1 unrouted)
  Top 0.152: C18.1 20.22,18.91 20.22,19.06 20.06,19.21 20.37,19.52 20.37,21.65 20.52,21.81 X2.2
P0.13  (via drill 0.35)  (1 unrouted)
  Top 0.152: v15.34,7.48 16.1,8.24 16.1,8.7 17.17,9.77 17.47,9.77 C30.1 | v10.61,5.95 10.61,5.65 10.92,5.35 10.92,4.89 SW_UP.2 | U$1.P$AD8 22.7,11.76 R5.1
  Bottom 0.152: v15.34,7.48 12.14,7.48 v10.61,5.95
P0.14  (2 unrouted)
  Top 0.152: R8.1 27.53,11.29 27.53,11.75 27.07,12.2 27.07,12.36 C31.1
P1.01  (2 unrouted)
P1.02  (via drill 0.35)
  Top 0.152: v28.29,14.64 27.53,13.88 27.23,13.88 U$1.P$W24 | R7.1 28.45,11.44 28.6,11.59 28.75,11.59 29.21,11.14 v29.21,10.38 32.71,6.87 33.02,6.87 33.32,6.57 33.32,5.95 | 33.32,5.95 35.91,5.95 38.96,2.91 41.55,2.91 0003.1 | 33.32,5.95 32.71,5.35 32.71,4.89 SW_DN.2
  Bottom 0.152: v28.29,14.64 29.21,13.73 v29.21,10.38
PMIC_INT  (1 unrouted)
PREVGH  (1 unrouted)
  Top 0.152: EPD_C9.2 2.69,8.39 4.09,8.39 D5.1
PREVGL
  Top 0.152: 10.61,12.36 10.77,12.2 11.22,12.2 J1.23 | 10.61,12.36 10.46,12.51 10.61,12.66 10.61,13.57 EPD_C11.2 | 10.61,12.36 10.61,12.2 10.46,12.05 10.46,11.14 11.22,10.38 11.99,10.38 D2.2
RESE
  Top 0.152: R1_EP_DR.2 12.29,23.63 12.6,23.63 12.9,23.94 13.51,23.94 Q3.2 13.66,24.09 13.81,23.94 12.14,22.26 11.38,22.26 J1.3
RESET  (2 unrouted)
RF  (via drill 0.35)
  Top 0.152: 43.38,21.35 43.99,20.74 43.99,20.43 ANT1.1 | 43.38,21.35 43.08,21.65 42.62,21.65 C22.2 | 40.03,21.96 36.52,21.96 36.37,22.11 36.07,22.11 35.91,21.96 35.76,22.11 L1.2 | 40.03,21.96 40.64,21.96 40.79,22.11 40.79,22.57 C4.2 | v43.38,21.5 43.38,21.35 | 40.03,21.96 v40.03,21.81
  Bottom 0.152: v43.38,21.5 40.33,21.5 v40.03,21.81
SCK  (via drill 0.35)
  Top 0.152: v23.87,21.81 23.87,21.19 24.18,20.89 24.63,20.89 24.94,20.59 24.94,19.98 24.63,19.67 24.18,19.67 23.72,19.21 23.72,18.91 U$1.P$A12 | v12.29,17.69 12.29,17.54 11.99,17.23 11.38,17.23 J1.13
  Bottom 0.152: v23.87,21.81 25.09,21.81 28.29,25 28.6,25 28.9,25.31 28.9,25.92 28.6,26.22 27.99,26.22 27.38,25.61 18.54,25.61 13.81,20.89 13.81,20.28 12.29,18.76 v12.29,17.69
SCL  (via drill 0.35)  (1 unrouted)
  Top 0.152: v19.91,7.33 20.22,7.33 20.52,7.63 20.52,7.78 20.22,8.09 IC2.C1 | v14.73,18.3 15.03,18 15.19,18 15.49,17.69 15.49,17.39 15.95,16.93 IC3.12 | 37.59,20.74 36.98,21.35 34.08,21.35 33.93,21.19 33.32,21.19 33.17,21.04 32.87,21.04 R17.2 | 37.59,20.74 37.59,19.37 32.56,14.34 32.41,14.34 31.65,13.57 31.49,13.73 31.19,13.73 U3.7 | 28.6,25.61 28.6,26.22 30.27,27.9 30.27,31.41 30.73,31.86 30.73,32.32 TP_SCL.TP | 28.6,25.61 28.6,24.4 | 28.6,24.4 28.6,23.63 29.05,23.18 29.21,23.18 IC1.B1 | v30.73,22.41 30.73,22.11 31.04,21.81 31.19,21.81 31.34,21.96 R4.2 | v29.21,24.24 29.05,24.4 28.6,24.4 | 37.59,20.74 39.72,20.74 40.18,21.19 40.33,21.19 41.4,22.26 v41.4,22.87 | 28.6,25.61 v28.29,25.61
  Bottom 0.152: v19.91,7.33 19.91,9.16 17.17,11.9 17.17,15.1 14.73,17.54 v14.73,18.3 14.73,19.06 14.27,19.52 14.27,20.89 18.69,25.31 27.99,25.31 v28.29,25.61 | v30.73,22.41 30.73,22.72 v29.21,24.24 31.8,26.83 31.8,27.44 32.41,28.05 33.47,28.05 38.66,22.87 v41.4,22.87
SDA  (via drill 0.35)
  Top 0.152: v28.45,22.87 28.75,22.87 28.9,22.72 IC1.C1 | 31.95,20.89 v31.65,20.59 | 31.95,20.89 31.95,21.35 R2.2 | 31.95,20.89 32.26,20.59 32.87,20.59 33.02,20.74 33.93,20.74 34.24,21.04 35,21.04 35.91,20.13 36.22,20.13 36.52,19.82 36.83,19.82 R18.2 | v31.34,14.95 31.19,14.79 U3.8 | 19.15,15.86 18.08,15.86 17.93,15.71 | 19.15,15.86 19.61,15.86 19.76,15.71 20.37,15.71 20.52,15.86 20.67,15.86 U$1.P$L1 | 17.93,15.71 17.78,15.71 17.62,15.86 17.47,15.71 17.32,15.71 17.17,15.86 17.02,15.86 16.56,16.32 IC3.2 | v18.84,6.41 18.84,7.17 19.61,7.94 IC2.B1 | v12.9,16.01 13.21,16.01 13.81,16.62 14.27,16.62 TP_SDA.TP | 17.93,15.71 17.93,14.95 17.78,14.79 17.78,14.34 v15.19,11.75 | 19.15,15.86 v19.15,16.01
  Bottom 0.152: v31.34,14.95 31.34,20.28 v31.65,20.59 29.36,22.87 v28.45,22.87 27.99,22.87 27.23,22.11 25.85,22.11 24.94,21.19 21.28,21.19 20.52,20.43 20.52,16.78 20.67,16.62 20.67,16.01 20.37,15.71 19.45,15.71 v19.15,16.01 | v18.84,6.41 18.39,6.41 17.32,5.35 10.31,5.35 10,5.65 10,10.53 12.9,13.42 | v12.9,16.01 12.9,13.42 | v15.19,11.75 14.58,11.75 12.9,13.42
SWDCLK
  Top 0.152: U$1.P$AA24 27.23,13.42 27.68,13.42 28.29,12.81 28.29,12.36 28.75,11.9 29.36,11.9 30.12,11.14 30.58,11.14 TP_SWDCLK.TP 31.33,10.34 J2.4
SWDIO  (1 unrouted)
  Top 0.152: TP_SWDIO.TP 34.63,11.85 34.63,10.83 35.87,9.59 39.5,9.59 J2.2
SWO
  Top 0.152: U$1.P$AD22 26.16,12.36 26.16,10.98 27.99,9.16 TP_SWO.TP
VBAT  (via drill 0.35)
  Top 0.152: IC1.C2 29.66,22.72 30.12,22.72 31.34,23.94 32.1,23.94 32.87,24.7 33.17,24.7 v33.32,24.85 34.08,25.61 34.08,25.77 33.93,25.92 C37.1 | U3.2 29.21,13.57 29.21,13.27 U3.3 29.21,13.12 28.6,13.12 28.29,13.42 v28.29,13.73 | 23.42,7.17 24.03,6.57 24.18,6.72 25.09,6.72 TP_VBAT.TP | 23.42,7.17 22.96,7.63 22.96,7.94 22.81,8.09 C27.2 | 23.42,7.17 v23.57,7.33
  Bottom 0.152: v23.57,7.33 24.48,8.24 24.48,9.92 v28.29,13.73 27.68,14.34 27.68,14.95 27.99,15.25 28.6,15.25 29.82,14.03 31.8,14.03 35.3,17.54 35.3,23.48 33.93,24.85 v33.32,24.85
VBUS  (via drill 0.35)  (3 unrouted)
  Top 0.152: v20.52,12.66 20.67,12.66 20.98,12.36 21.13,12.36 U$1.P$AD2 | 15.95,21.65 16.1,21.81 16.86,21.81 D3.5 | 15.95,21.65 v15.64,21.35 | 17.93,28.66 17.62,28.97 | 17.62,28.97 17.47,29.12 17.47,29.88 C42.1 | 17.93,28.66 17.93,25.16 15.8,23.02 15.8,21.81 15.95,21.65 | 31.49,30.8 32.87,32.17 34.54,32.17 C21.1 | 31.49,30.8 31.34,30.64 31.34,30.03 C43.1 31.19,30.03 31.04,29.88 31.19,29.73 31.19,29.43 32.71,27.9 v32.71,27.44 | v40.64,19.06 40.79,19.21 40.79,19.98 C38.1 | 17.62,28.97 v17.93,29.27 17.93,28.66 | 31.49,30.8 v31.34,30.95
  Bottom 0.152: v20.52,12.66 20.06,12.66 19.3,13.42 19,13.42 17.78,14.64 17.78,15.4 15.64,17.54 v15.64,21.35 | v40.64,19.06 32.71,26.99 v32.71,27.44 | v17.93,29.27 19.61,29.27 23.72,33.39 28.9,33.39 v31.34,30.95
VREG
  Top 0.152: 31.8,25.46 30.88,24.55 30.88,24.09 29.97,23.18 29.66,23.18 IC1.B2 | 31.8,25.46 33.32,26.99 33.32,28.51 C39.1 | 31.8,25.46 TP_VREG.TP